# Altium PCB 3102_rev02.PcbDoc
Units mil, origin at the board's own origin, x right, y up, seen from the top; angles counter-clockwise.
Board outline 6000 x 4000 mil, 2 copper layers (Top Layer, Bottom Layer); 10 components, 16 nets, 66 pads, 0 vias.
Unrouted connection lines stored in the file: 26.
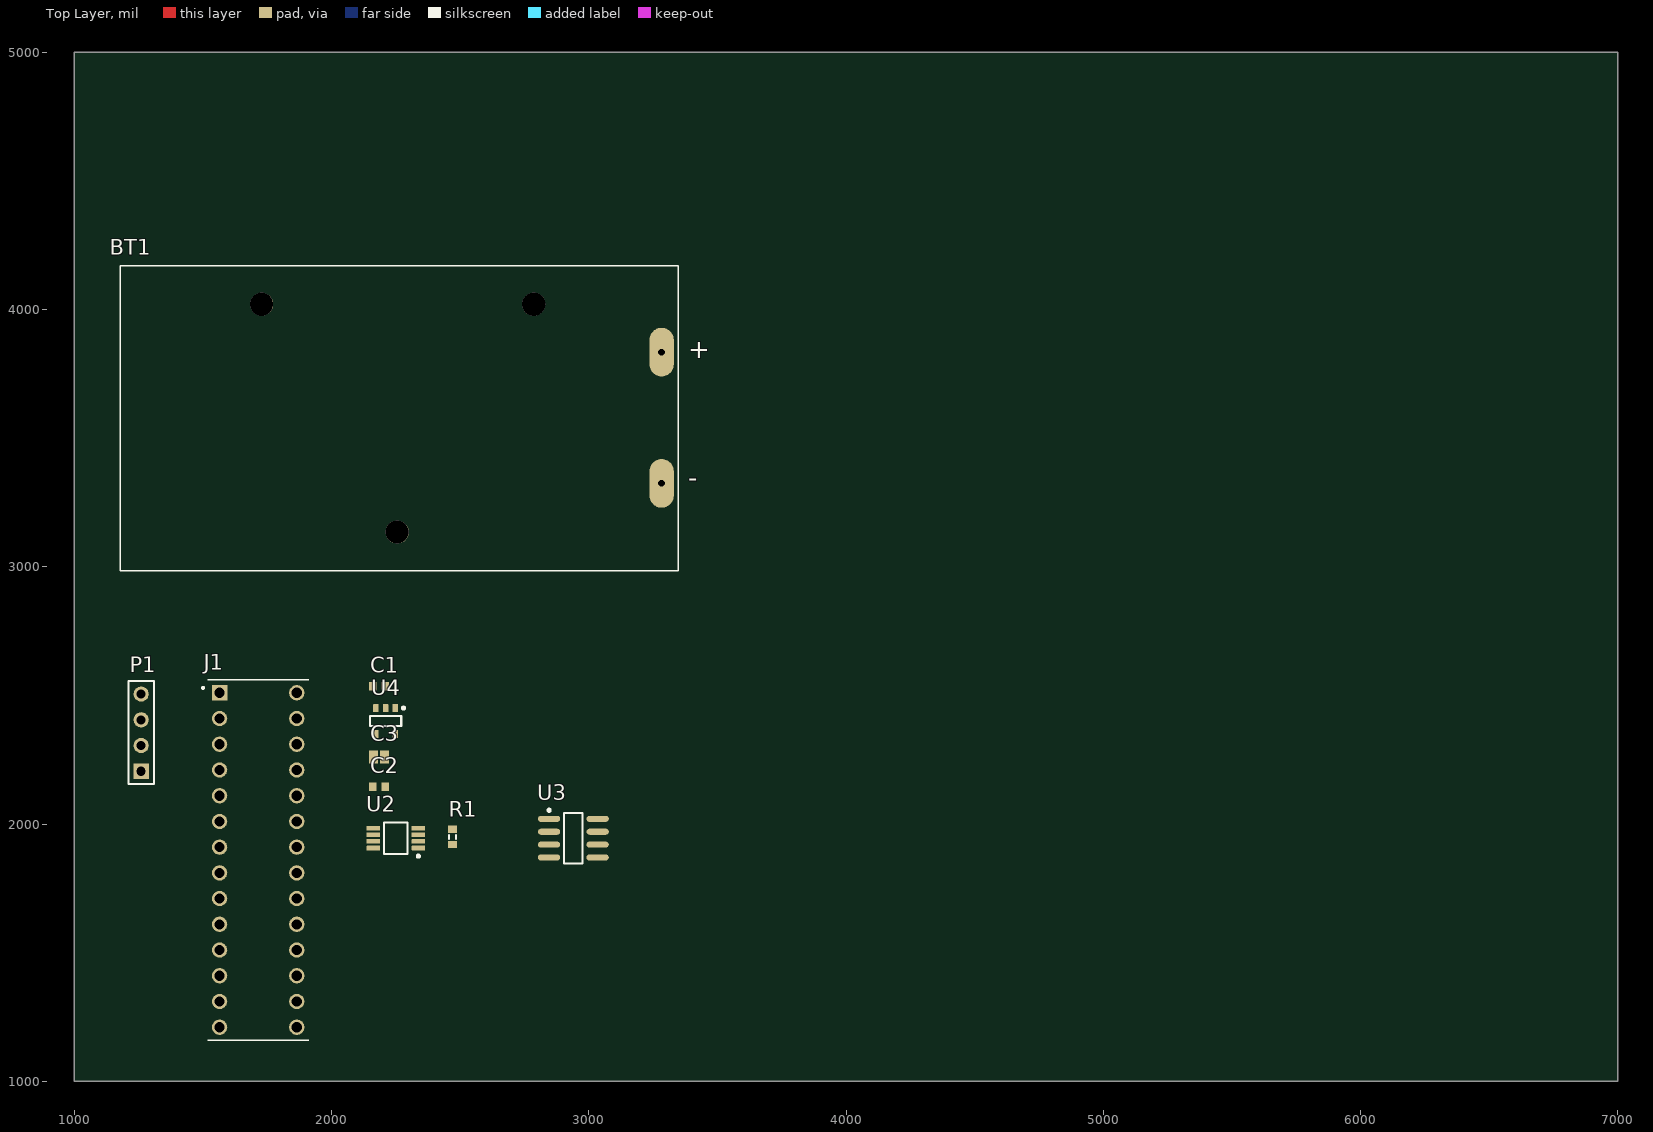
[diagram p0: Top Layer view]
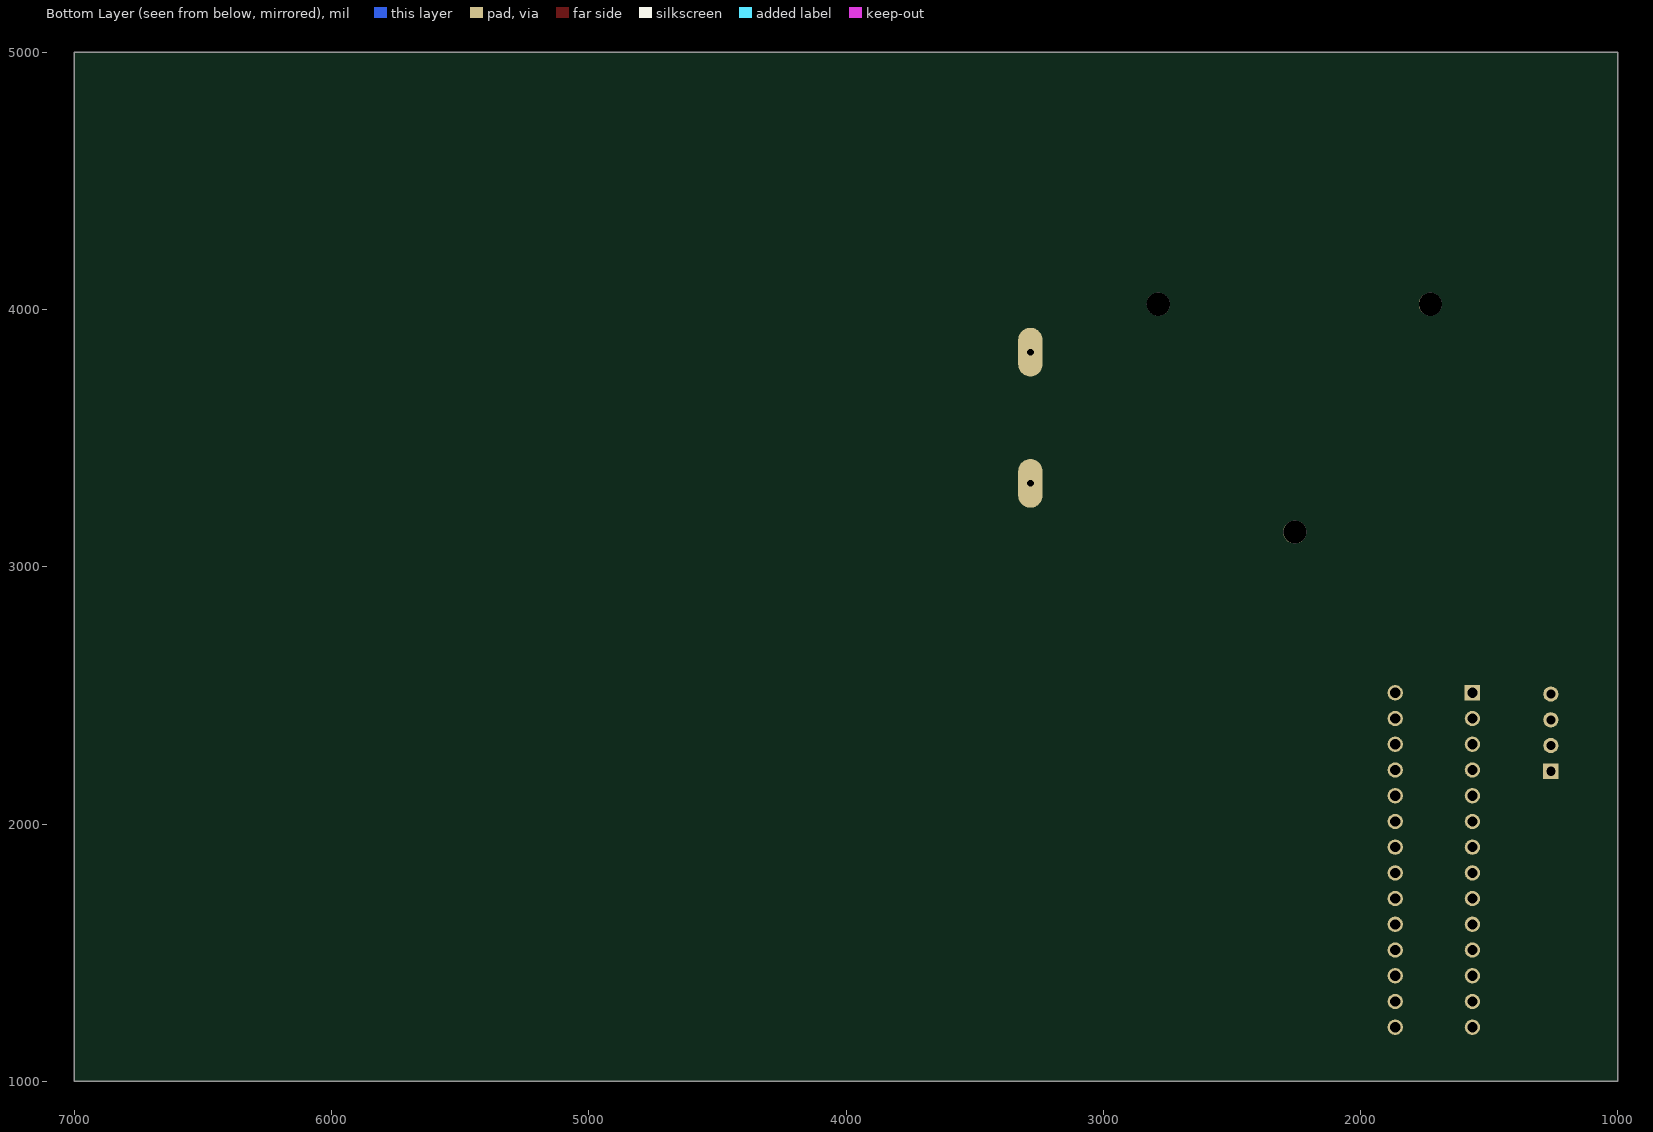
[diagram p1: Bottom Layer view, seen from below]

## Layer stack, top to bottom
Top Solder: solder mask 0.4, Solder Resist, Dk 3.5
Top Layer: signal copper 1.4
Dielectric 1: dielectric 12.6, FR-4, Dk 4.8
Bottom Layer: signal copper 1.4
Bottom Solder: solder mask 0.4, Solder Resist, Dk 3.5

## Board outline
1000,1000 7000,1000 7000,5000 1000,5000

## Design rules (kind name [scope] priority, off if disabled: settings)
Clearance [All] p1: gap=10 ignorepadtopadclearanceinfootprint=FALSE except(0: Arc-Hole Track-Hole SMDPad-Hole THPad-Hole Via-Hole Fill-Hole Poly-Hole Region-Hole Text-Hole)
PolygonConnect [All] p1: connectstyle=Relief reliefconductorwidth=10 reliefentries=4 polygonreliefangle="90 Angle" airgapwidth=10
RoutingVias [All] p1: holewidth=28 width=50 viastyle="Through Hole" minholewidth=28 minwidth=50 maxholewidth=28 maxwidth=50
SolderMaskExpansion [All] p1: expansion=4
Width [All] p1: maxlimit=10 minlimit=10 preferedwidth=10
30 further rules are at their usual default settings.

## Classes and differential pairs
component class ard_connector: J1
component class 3102_Sheet: BT1 C1 C2 C3 P1 R1 U2 U3 U4

## Components (designator, comment, footprint, x,y, rotation, side; value= is the part's Value field where it differs from the comment)
BT1 "BC9VPC" *BAT_BC9VPC_BC9VPC(Primary) 2786.1,4020.83 r0 top
C1 "1uF" CAPC1608X90X30LL10T20 2185,2535 r0 top
C2 "2.2uF" CAPC1608X90X35LL10T15 2185,2145 r0 top
C3 "0.01uF" CAPC1613X90X50LL10T25 2185,2260 r0 top
J1 "1-2199298-9" *DIP762W60P254L3556H510Q28 1715,1860 r0 top
P1 "I2C Connector" HDR1X4 1260,2205 r90 top
R1 "Res3" J1-0603 2470,1950 r90 top value=25K
U2 "INA826AIDGKR" DGK0008A_N 2250,1945 r180 top
U3 "AAL002-02" SO8_N 2940,1945 r0 top
U4 "LP2985IM5-5.0/NOPB" DBV0005A_L 2210,2400 r270 top

## Footprints (in the part's own frame and the unit in brackets; to place one, negate y for a bottom-side part, rotate by r counter-clockwise, add the part's x,y. Pads: shape width x height; smd on the part's side, far side on the other; paste and mask are expansions set on the pad)
*BAT_BC9VPC_BC9VPC(Primary) [mm]
  oval 2.41x4.82 hole 0.66: N(12.62,-17.69) P(12.62,-4.74)
  round 2.29 hole 2.29 unplated: None(-26.87,0) None(-13.49,-22.5) None(0,0)
  silkscreen extent -40.85,-26.31 14.27,3.81
*DIP762W60P254L3556H510Q28 [mm]
  rect 1.508x1.508 hole 1: 1(-3.81,16.51)
  round 1.508 hole 1: 2(-3.81,13.97) 3(-3.81,11.43) 4(-3.81,8.89) 5(-3.81,6.35) 6(-3.81,3.81) 7(-3.81,1.27) 8(-3.81,-1.27) 9(-3.81,-3.81) 10(-3.81,-6.35) 11(-3.81,-8.89) 12(-3.81,-11.43) 13(-3.81,-13.97) 14(-3.81,-16.51) 15(3.81,-16.51) 16(3.81,-13.97) 17(3.81,-11.43) 18(3.81,-8.89) 19(3.81,-6.35) 20(3.81,-3.81) 21(3.81,-1.27) 22(3.81,1.27) 23(3.81,3.81) 24(3.81,6.35) 25(3.81,8.89) 26(3.81,11.43) 27(3.81,13.97) 28(3.81,16.51)
  silkscreen extent -5.55,-17.78 5,17.78
CAPC1608X90X30LL10T20 [mm] "Chip Capacitor, 2-Leads, Body 1.70x0.90mm, IPC High Density"
  rect 0.75x0.85 smd: 1(-0.625,0) 2(0.625,0)
  body extent -0.85,-0.45 0.85,0.45, height 0.9
CAPC1608X90X35LL10T15 [mm] "Chip Capacitor, 2-Leads, Body 1.7x0.9mm, IPC High Density"
  rect 0.75x0.85 smd: 1(-0.625,0) 2(0.625,0)
  body extent -0.85,-0.45 0.85,0.45, height 0.9
CAPC1613X90X50LL10T25 [mm] "Chip Capacitor, 2-Leads, Body 1.60x1.25mm, IPC High Density"
  rect 0.9x1.3 smd: 1(-0.55,0) 2(0.55,0)
  body extent -0.85,-0.67 0.85,0.68, height 0.9
DBV0005A_L [mm] "SOT23, 5-Leads, Body 3.05x1.75mm, Pitch 0.95mm, IPC High Density"
  rrect18% 0.8x0.55 smd: 1(-1.275,0.95) 2(-1.275,0) 3(-1.275,-0.95) 4(1.275,-0.95) 5(1.275,0.95)
  silkscreen extent -1.4,-1.55 0.5,1.9, body extent -1.42,-1.46 1.42,1.46, height 1.08
DGK0008A_N [mm] "TSOP, 8-Leads, Body 3.1x3.1mm, Pitch 0.65mm, IPC Medium Density"
  rrect22% 1.35x0.45 smd: 1(-2.225,0.975) 2(-2.225,0.325) 3(-2.225,-0.325) 4(-2.225,-0.975) 5(2.225,-0.975) 6(2.225,-0.325) 7(2.225,0.325) 8(2.225,0.975)
  silkscreen extent -2.35,-1.55 1.15,1.9, body extent -2.45,-1.5 2.45,1.5, height 0.94
HDR1X4 [mm] "Connector; Header; 4 Position"
  rect 1.5x1.5 hole 0.9: 1(0,0)
  round 1.5 hole 0.9: 2(2.54,0) 3(5.08,0) 4(7.62,0)
  silkscreen extent -1.27,-1.27 8.89,1.27
J1-0603 [mm] "Chip Resistor, Body 1.6x0.8mm, IPC High Density"
  rect 0.7x0.9 smd: 1(-0.75,0) 2(0.75,0)
  silkscreen extent -0.2,-0.35 0.2,0.35, body extent -0.85,-0.48 0.85,0.48, height 0.9
SO8_N [mm] "SOIC, 8-Leads, Body 4.9x3.9mm, Pitch 1.27mm, IPC Medium Density"
  oval 2.2x0.6 smd: 1(-2.4,1.905) 2(-2.4,0.635) 3(-2.4,-0.635) 4(-2.4,-1.905) 5(2.4,-1.905) 6(2.4,-0.635) 7(2.4,0.635) 8(2.4,1.905)
  silkscreen extent -2.52,-2.5 0.9,2.88, body extent -2,-2.5 2,2.5, height 1.75

## Part data
BT1: "BATTERY HOLDER 9V PC PIN", Package=None, Availability=Unavailable, MF=MPD, MP=BC9VPC, Price=None, SnapEDA_Link=https://www.snapeda.com/parts/BC9VPC/MPD/view-part/4389071/?ref=snap
C1: library part CMP-2000-06093-1, "Chip Capacitor, 1 uF, +/- 10%, 16 V, -55 to 125 degC, 0603 (1608 Metric), RoHS, Tape and Reel", Capacitance=1000000pF, Case Size/Dimension=0603, Dielectric=X7R, Manufacturer="Samsung Electro-Mechanics", Package Description="2-Pin Surface Mount Device, Body 1.60 x 0.80 mm", Rated Voltage=16V, Tolerance (%)=±10%, Datasheet URL=http://www.samsungsem.com/kr/support/product-search/mlcc/__icsFiles/afieldfile/2016/08/18/S_CL10B105KO8NNNC.pdf, Datasheet Version=07/2016, Manufacturer URL=http://www.samsungsem.com/global/index.jsp, Mounting Technology=SurfaceMount, Package Reference=0603
C2: library part CMP-1662-00016-2, "Chip Capacitor, 2.2 uF, +/- 10%, 10 V, -55 to 85 degC, 0603 (1608 Metric), RoHS, Tape and Reel", Capacitance="2.2 uF", Case/Package=0603, Case Code (Metric)=1608, Max Operating Temperature="85 degC", Min Operating Temperature="-55 degC", Package Quantity=10000, PartNumber=GRM188R61A225KE34x, Tolerance=10%, Case Code (Imperial)=0603, ComponentLink1Description="Manufacturer URL", ComponentLink1URL=http://www.murata.com/, ComponentLink2Description=Datasheet, ComponentLink2URL=https://datasheet.ciiva.com/134/grm188r61a225ke34-01-134206.pdf, DatasheetVersion=01/2013, Height="0.8 mm", Length="0.063 inch", Mounting Technology="Surface Mount", PackageDescription="2-Pin Surface Mount Device, Body 1.6 x 0.8 mm", Packaging="Tape and Reel", Radiation Hardening=No, RoHSCompliant=True, Width="0.031 inch"
C3: library part CMP-2006-02215-1, Manufacturer=Yageo, Part Number=CC0603KPX7R9BB103
J1: "28P,DIP SKT,300 CL,LDR,PB FREE", Package="PDIP-28 TE Connectivity", Centerline_Pitch="2.54 mm[.1 in]", Digi-Key_Part_Number=A120353-ND, Digi-Key_Purchase_URL=https://www.digikey.com/product-detail/en/te-connectivity-amp-connectors/1-2199298-9/A120353-ND/5022045?utm_source=snapeda&utm_medium=aggregator&utm_campaign=symbol, EU_RoHS_Compliance=Compliant, MF="TE Connectivity", MP=1-2199298-9, Number_of_Positions=28, Product_Type=Socket, SnapEDA_Link=https://www.snapeda.com/parts/1-2199298-9/TE%20Connectivity%20AMP%20Connectors/view-part/1265789/?ref=snap, TE_purchase_URL=https://www.te.com/usa-en/product-1-2199298-9.html?te_bu=Cor&te_type=disp&te_campaign=seda_glo_cor-seda-global-disp-prtnr-fy19-seda-model-bom-cta_sma-317_1&elqCampaignId=32493
R1: "Resistor", LatestRevisionDate=29-May-2009, LatestRevisionNote="IPC-7351 Footprint Added.", PackageDescription="Chip Resistor", PackageReference=J1-0603, Published=8-Jun-2000, Publisher="Altium Limited"
U2: library part CMP-0944-00060-2, "Precision, 200-uA Supply Current, 36-V Supply Instrumentation Amplifier, -40 to 125 degC, 8-pin SOP (DGK8), Green (RoHS & no Sb/Br)", Input Bias Current (+/-)(Max)(nA)=65, Manufacturer="Texas Instruments", Quiescent Current (+/-)(Typ)(mA)=0.2, CMRR(Min)(dB)=84, Code_JEDEC=MO-187, ComponentLink1Description="Manufacturer URL", ComponentLink1URL=http://www.ti.com/, ComponentLink2Description=Datasheet, ComponentLink2URL=http://www.ti.com/general/docs/lit/getliterature.tsp?genericPartNumber=INA826&fileType=pdf, ComponentLink3Description="Package Specification", ComponentLink3URL=http://www.ti.com/litv/pdf/mpds028d, DatasheetVersion=SBOS562E, Eco-Plan="Green (RoHS & no Sb/Br)", Gain(V/V)="1 to 1000", Input Offset (+/-)(Max)(uV)=150, Input Offset Drift (+/-)(Max)(uV/Degrees Celsius)=2, Mounting Technology="Surface Mount", Noise at 1kHz(Typ)(nV/rt(Hz))=18, Non-Linearity (+/-)(Max)(%)=0.0005, Number of Channels=1, Output Offset (+/-)(Max)(uV)=700, Output Offset Drift (+/-)(Max)(uV/Degrees Celsius)=10, PackageDescription="8-Pin Thin Small Outline, Body 3 x 3 mm, Pitch 0.65 mm", PackageReference=DGK0008A, PackageVersion="4073329/E, 05/2006", PartNumber=INA826AIDGKR, SubFamily="Single Supply", Vs(Max)(V)=36, Vs(Min)(V)=2.7
U3: "NVE Magnetic Sensor"
U4: library part CMP-0062-02017-3, "Micropower 150 mA Low-Noise Ultra Low-Dropout Regulator, 5-pin SOT-23, Pb-Free", Manufacturer="Texas Instruments", PackageTopMarking=L0UB*XTT, PowerWise=N, ComponentLink1Description="Datasheet URL", ComponentLink1URL=http://www.ti.com/general/docs/lit/getliterature.tsp?genericPartNumber=LP2985-N&fileType=pdf, CompType="LDO IC", PackageDescription="Molded SOT-23, .115 x .063 x .040 in Body, 5 Lead, .0375 in Pitch", PackageReference=DBV0005A, PinCount=5, RoHS=Y

## Nets (pads, with @x,y where several pads share a name; then routed paths per layer and width w, separated by ;. In a path a pad name is that pad's centre, name@x,y a point inside that pad or via, vN(x,y) a via of type N, cw(c..) or ccw(c..) an arc to the next point about the centre after c; other vN are vias at no path point)
9V: BT1.P C1.1 U4.1 U4.3
ADC0: J1.23 U2.7
ADC1: J1.24
ADC2: J1.25
ADC3: J1.26
AREF: J1.21
AVCC: J1.20
GND: BT1.N C1.2 C2.1 C3.1 J1.8 J1.22 P1.1 U2.6 U2.8 U3.4 U4.2
NetC3_2: C3.2 U4.4
NetR1_1: R1.1 U2.2
NetR1_2: R1.2 U2.3
NetU2_1: U2.1 U3.5
NetU2_4: U2.4 U3.1
SCL: J1.28 P1.4
SDA: J1.27 P1.3
VCC: C2.2 J1.7 P1.2 U2.5 U3.8 U4.5
pads on no net: BT1.None J1.1 J1.2 J1.3 J1.4 J1.5 J1.6 J1.9 J1.10 J1.11 J1.12 J1.13 J1.14 J1.15 J1.16 J1.17 J1.18 J1.19 U3.2 U3.3 U3.6 U3.7

## Text inside footprints (layer, text, board x,y; h text height)
BT1: Mechanical 4 "-" at 3386.1,3310.98 h73.82; Mechanical 4 "+" at 3386.1,3810.98 h73.82; Mechanical 4 "Refer datasheet for NPTH countersink dimensions" at 1136.1,2710.98 h73.82; Mechanical 4 "-" at 3386.1,3310.98 h73.82; Mechanical 4 "+" at 3386.1,3810.98 h73.82; Mechanical 4 "Refer datasheet for NPTH countersink dimensions" at 1136.1,2710.98 h73.82; Top Overlay "-" at 3386.1,3310.98 h73.82; Top Overlay "+" at 3386.1,3810.98 h73.82